# Altium PCB hapticDriverV3.PcbDoc
Units mm, origin at the board's own origin, x right, y up, seen from the top; angles counter-clockwise.
Board outline 27.94 x 55 mm, 4 copper layers (Top Layer, Int1 (GND), Int2 (PWR), Bottom Layer), stack 1.369 mm thick; 78 components, 72 nets, 325 pads, 120 vias.
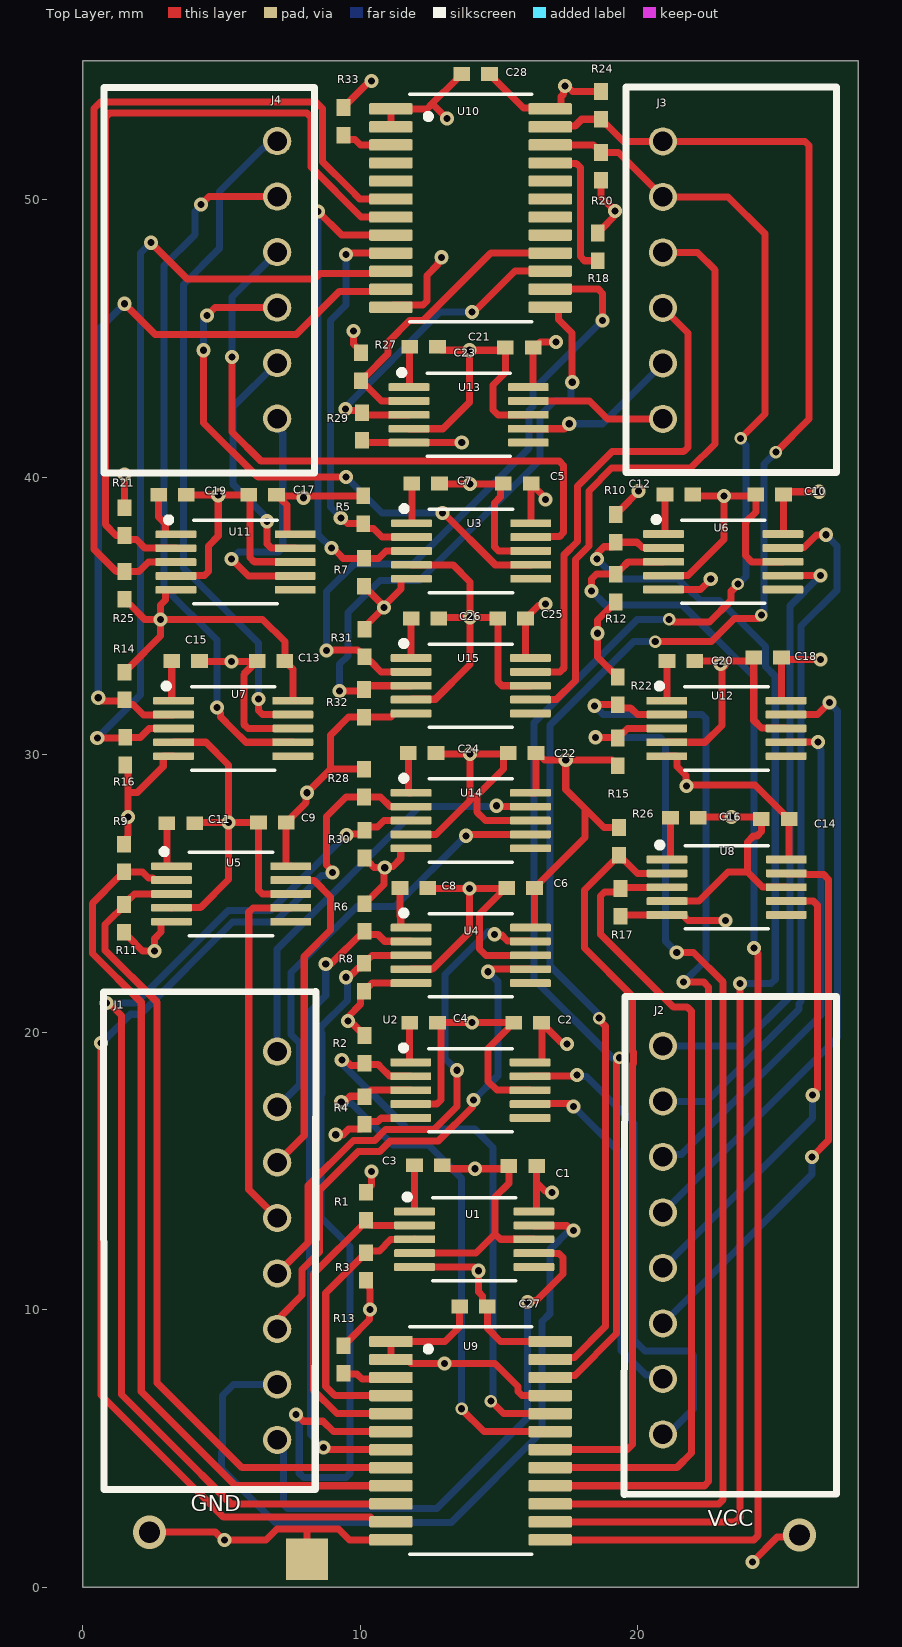
[diagram p0: Top Layer view]
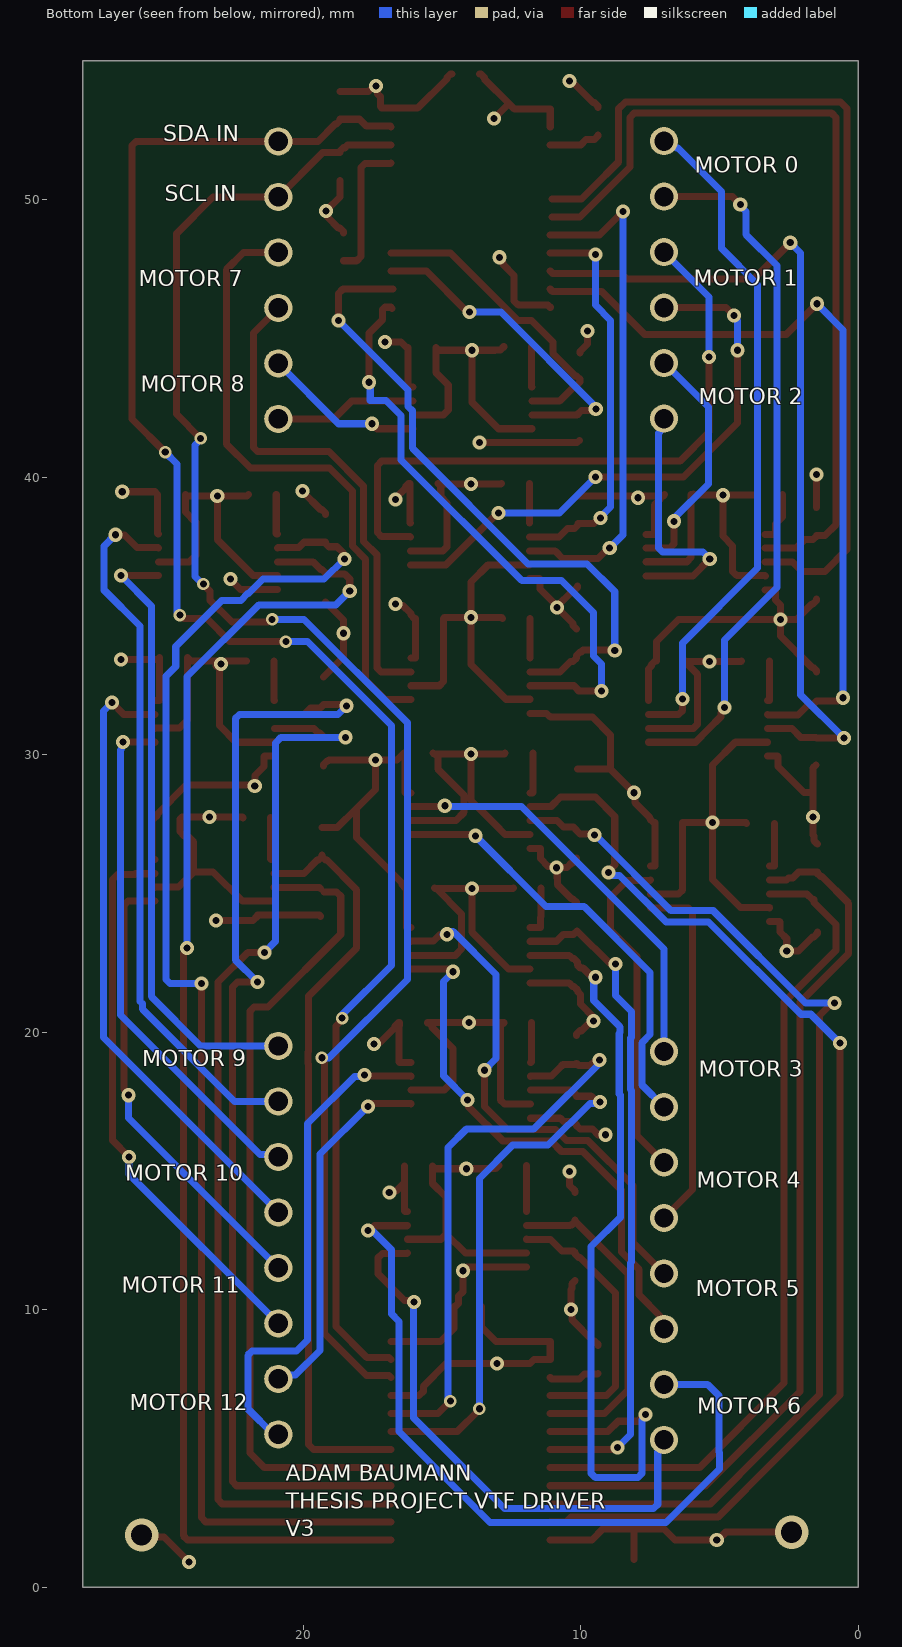
[diagram p1: Bottom Layer view, seen from below]
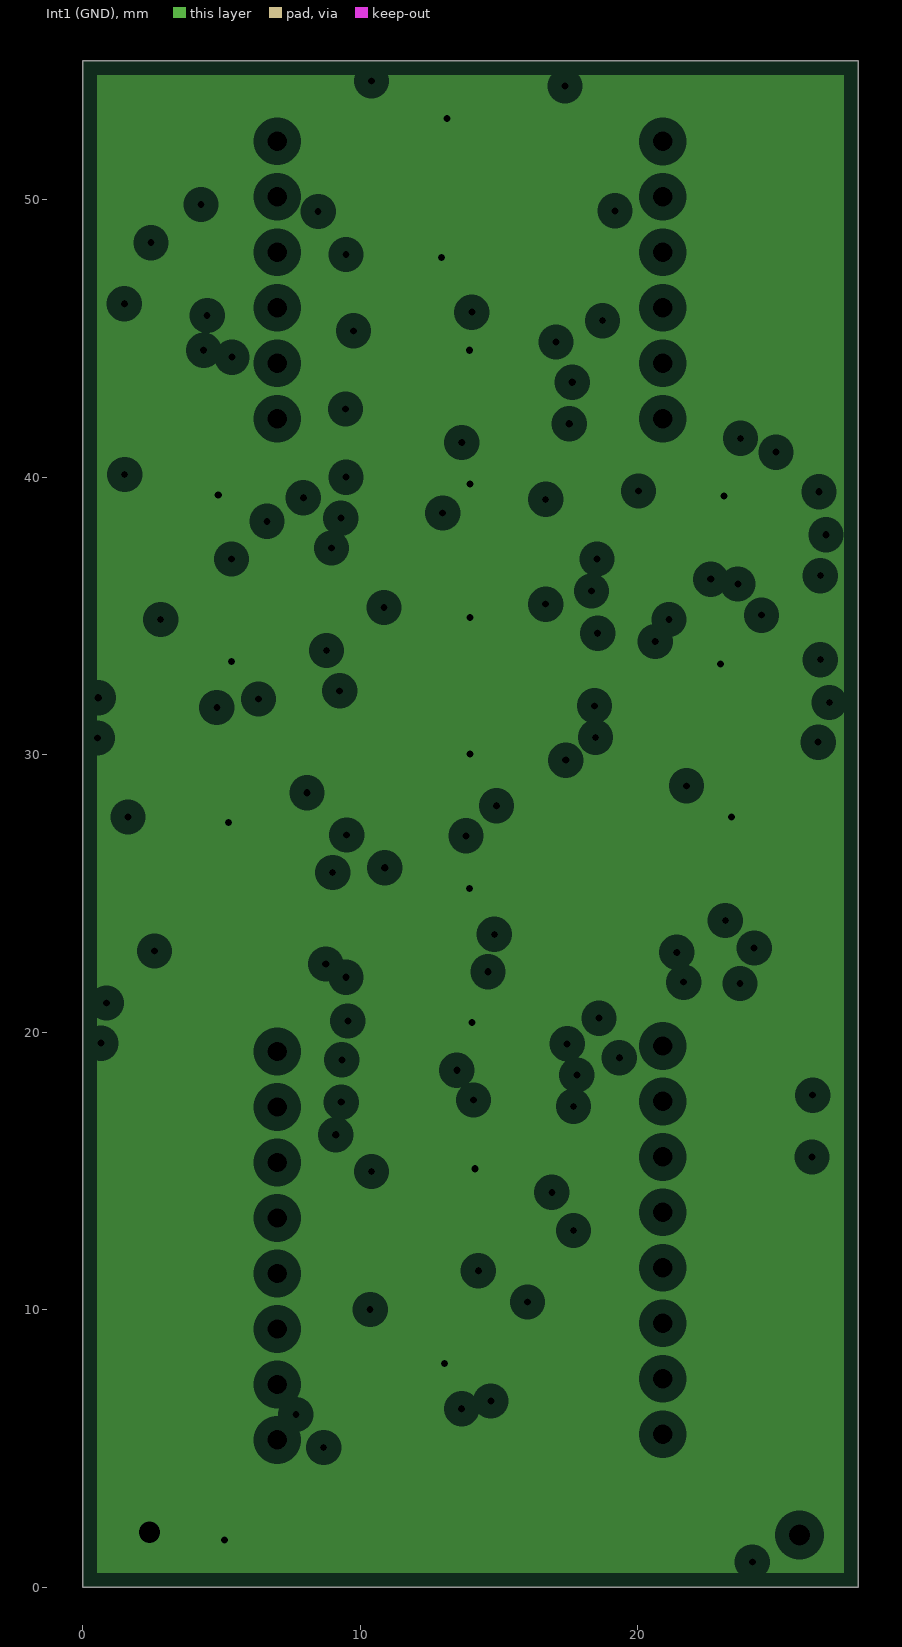
[diagram p2: Int1 (GND), clearances drawn from the general rule]
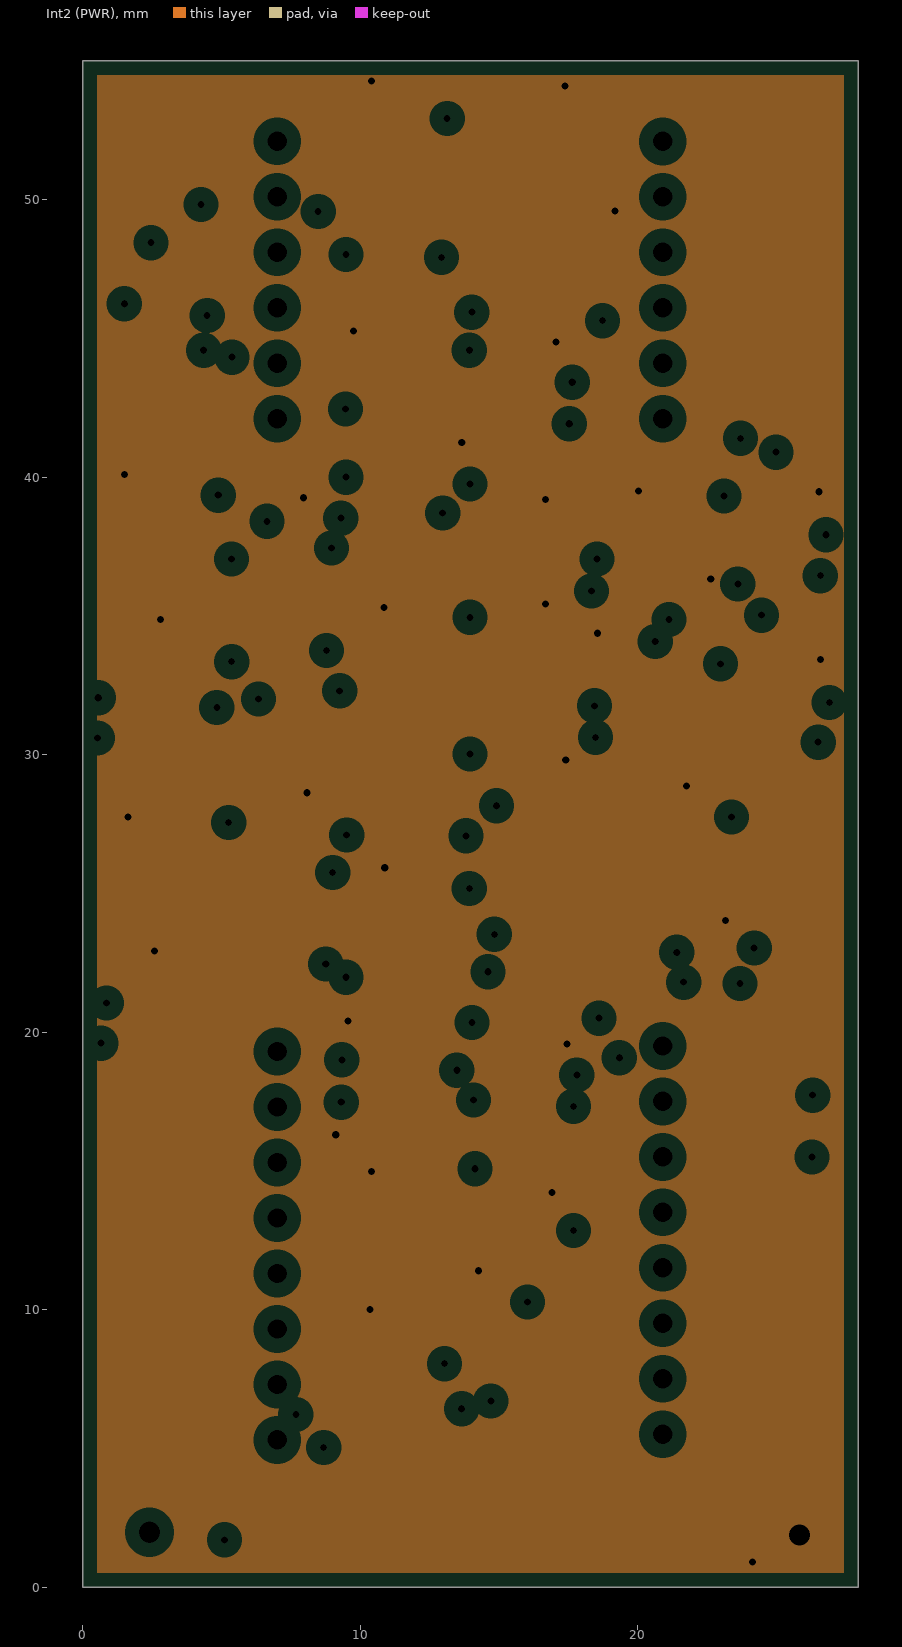
[diagram p3: Int2 (PWR), clearances drawn from the general rule]

## Layer stack, top to bottom
Top Solder: solder mask 0.0254, SM-001, Dk 4
Top Layer: signal copper 0.035
Dielectric 1: prepreg 0.1295, PP-017, Dk 4.3
Dielectric 2: prepreg 0.1295, PP-017, Dk 4.3
Int1 (GND): plane copper 0.035, net GND
Dielectric 3: core 0.7112, Core-039, Dk 4.8
Int2 (PWR): plane copper 0.035, net VCC
Dielectric 4: prepreg 0.1295, PP-017, Dk 4.3
Dielectric 5: prepreg 0.1295, PP-017, Dk 4.3
Bottom Layer: signal copper 0.035
Bottom Solder: solder mask 0.0254, SM-001, Dk 4

## Board outline
0,0 0,55 27.94,55 27.94,0

## Design rules (kind name [scope] priority, off if disabled: settings)
Clearance [All] p1: gap=0.152 ignorepadtopadclearanceinfootprint=FALSE except(0: Arc-Hole Track-Hole SMDPad-Hole THPad-Hole Via-Hole Fill-Text Fill-Hole Poly-Text Poly-Hole Region-Text Region-Hole Text-Text Text-Hole)
HoleSize [All] p1: absolutevalues=TRUE maxlimit=2 minlimit=0.2 maxpercent=80.000 minpercent=20.000
PlaneClearance [All] p1: clearance=0.508
PlaneConnect [All] p1: planeconnectstyle=Relief reliefexpansion=0.508 reliefentries=4 reliefconductorwidth=0.254 reliefairgap=0.254
PolygonConnect [All] p1: connectstyle=Relief reliefconductorwidth=0.254 reliefentries=4 polygonreliefangle="90 Angle" airgapwidth=0.254
RoutingVias [All] p1: holewidth=0.254 width=0.508 viastyle="Through Hole" minholewidth=0.2 minwidth=0.45 maxholewidth=0.711 maxwidth=1.27
SilkToSilkClearance [All] p1: silktosilkclearance=0
SolderMaskExpansion [All] p1: expansion=0.102 istentingtop=FALSE
Width [All] p1: maxlimit=0.254 minlimit=0.254 preferedwidth=0.254
26 further rules are at their usual default settings.

## Components (designator, comment, footprint, x,y, rotation, side; value= is the part's Value field where it differs from the comment)
C1 "Cap Pol3" 0402 15.85,15.175 r180 top value=1uF
C2 "Cap Pol3" 0402 16.025,20.337 r180 top value=1uF
C3 "Cap Pol3" 0402 12.45,15.2 r0 top value=1uF
C4 "Cap Pol3" 0402 12.275,20.337 r0 top value=1uF
C5 "Cap Pol3" 0402 15.65,39.771 r180 top value=1uF
C6 "Cap Pol3" 0402 15.775,25.195 r180 top value=1uF
C7 "Cap Pol3" 0402 12.35,39.771 r0 top value=1uF
C8 "Cap Pol3" 0402 11.925,25.195 r0 top value=1uF
C9 "Cap Pol3" 0402 6.825,27.55 r180 top value=1uF
C10 "Cap Pol3" 0402 24.75,39.38 r180 top value=1uF
C11 "Cap Pol3" 0402 3.525,27.525 r0 top value=1uF
C12 "Cap Pol3" 0402 21.475,39.38 r0 top value=1uF
C13 "Cap Pol3" 0402 6.775,33.375 r180 top value=1uF
C14 "Cap Pol3" 0402 24.95,27.675 r180 top value=1uF
C15 "Cap Pol3" 0402 3.7,33.375 r0 top value=1uF
C16 "Cap Pol3" 0402 21.675,27.725 r0 top value=1uF
C17 "Cap Pol3" 0402 6.475,39.369 r180 top value=1uF
C18 "Cap Pol3" 0402 24.675,33.5 r180 top value=1uF
C19 "Cap Pol3" 0402 3.225,39.369 r0 top value=1uF
C20 "Cap Pol3" 0402 21.55,33.375 r0 top value=1uF
C21 "Cap Pol3" 0402 15.725,44.675 r180 top value=1uF
C22 "Cap Pol3" 0402 15.825,30.054 r180 top value=1uF
C23 "Cap Pol3" 0402 12.275,44.7 r0 top value=1uF
C24 "Cap Pol3" 0402 12.225,30.054 r0 top value=1uF
C25 "Cap Pol3" 0402 15.45,34.912 r180 top value=1uF
C26 "Cap Pol3" 0402 12.325,34.912 r0 top value=1uF
C27 "Cap Pol3" 0402 14.075,10.104 r180 top value=1uF
C28 "Cap Pol3" 0402 14.15,54.529 r180 top value=1uF
J1 "8-pin-connector" 8-pin-connector 7,5.3 r180 top locked
J2 "8-pin-connector" 8-pin-connector 20.9,19.5 r0 top locked
J3 "6-pin-connector" 6-PIN-CONNECTOR 20.9,52.112 r0 top locked
J4 "6-pin-connector" 6-PIN-CONNECTOR 7,42.1 r180 top locked
R1 "Res1" 0402 10.2,13.725 r90 top value=2.2K
R2 "Res1" 0402 10.15,19.375 r90 top value=2.2K
R3 "Res1" 0402 10.2,11.55 r270 top value=2.2k
R4 "Res1" 0402 10.15,17.175 r270 top value=2.2k
R5 "Res1" 0402 10.1,38.825 r90 top value=2.2K
R6 "Res1" 0402 10.15,24.129 r90 top value=2.2K
R7 "Res1" 0402 10.125,36.575 r270 top value=2.2k
R8 "Res1" 0402 10.125,21.975 r270 top value=2.2k
R9 "Res1" 0402 1.475,26.275 r90 top value=2.2K
R10 "Res1" 0402 19.2,38.154 r90 top value=2.2K
R11 "Res1" 0402 1.475,24.1 r270 top value=2.2k
R12 "Res1" 0402 19.2,36 r270 top value=2.2k
R13 "Res3" 0402 9.386,8.2 r90 top value=10k
R14 "Res1" 0402 1.5,32.475 r90 top value=2.2K
R15 "Res1" 0402 19.325,26.875 r90 top value=2.2K
R16 "Res1" 0402 1.525,30.125 r270 top value=2.2k
R17 "Res1" 0402 19.375,24.675 r270 top value=2.2k
R18 "Res1" 0402 18.554,48.3 r270 top value=2.2K
R20 "Res1" 0402 18.675,51.2 r90 top value=2.2K
R21 "Res1" 0402 1.5,38.4 r90 top value=2.2K
R22 "Res1" 0402 19.275,32.3 r90 top value=2.2K
R24 "Res1" 0402 18.675,53.4 r270 top value=2.2K
R25 "Res1" 0402 1.5,36.1 r270 top value=2.2k
R26 "Res1" 0402 19.275,30.1 r270 top value=2.2k
R27 "Res1" 0402 10.025,43.979 r90 top value=2.2K
R28 "Res1" 0402 10.125,28.975 r90 top value=2.2K
R29 "Res1" 0402 10.05,41.825 r270 top value=2.2k
R30 "Res1" 0402 10.15,26.775 r270 top value=2.2k
R31 "Res1" 0402 10.15,34.025 r90 top value=2.2K
R32 "Res1" 0402 10.125,31.85 r270 top value=2.2k
R33 "Res3" 0402 9.386,52.825 r90 top value=10k
U1 "DRV2605LDGSR" SOP50P490X110-10N 14.1,12.534 r0 top
U2 "DRV2605LDGSR" SOP50P490X110-10N 13.964,17.907 r0 top
U3 "DRV2605LDGSR" SOP50P490X110-10N 13.989,37.341 r0 top locked
U4 "DRV2605LDGSR" SOP50P490X110-10N 13.975,22.766 r0 top
U5 "DRV2605LDGSR" SOP50P490X110-10N 5.339,24.979 r0 top
U6 "DRV2605LDGSR" SOP50P490X110-10N 23.075,36.95 r0 top
U7 "DRV2605LDGSR" SOP50P490X110-10N 5.414,30.946 r0 top
U8 "DRV2605LDGSR" SOP50P490X110-10N 23.2,25.221 r0 top
U9 "TCA9548APWR" SOP65P640X120-24N 13.97,5.275 r0 top locked
U10 "TCA9548APWR" SOP65P640X120-24N 13.97,49.7 r0 top locked
U11 "DRV2605LDGSR" SOP50P490X110-10N 5.5,36.94 r0 top locked
U12 "DRV2605LDGSR" SOP50P490X110-10N 23.189,30.946 r0 top
U13 "DRV2605LDGSR" SOP50P490X110-10N 13.9,42.246 r0 top
U14 "DRV2605LDGSR" SOP50P490X110-10N 13.975,27.624 r0 top
U15 "DRV2605LDGSR" SOP50P490X110-10N 13.975,32.483 r0 top

## Footprints (in the part's own frame and the unit in brackets; to place one, negate y for a bottom-side part, rotate by r counter-clockwise, add the part's x,y. Pads: shape width x height; smd on the part's side, far side on the other; paste and mask are expansions set on the pad)
6-PIN-CONNECTOR [mil] "J"
  round 40 hole 27.56: 0(0,-0.49) 1(0,-79.23) 2(0,-157.97) 3(0,-236.71) 4(0,-315.45) 5(0,-394.19)
  silkscreen extent -53,-471 246,77
8-pin-connector [mil]
  round 40 hole 27.56: 0(0,0) 1(0,-78.74) 2(0,-157.48) 3(0,-236.22) 4(0,-314.96) 5(0,-393.7) 6(0,-472.44) 7(0,-551.18)
  silkscreen extent -55,-636 247,70
0402 [mm] "Chip Capacitor, Body 1.0x0.5mm, IPC High Density"
  rect 0.6x0.5 smd: 1(-0.5,0) 2(0.5,0)
  body extent -0.55,-0.3 0.55,0.3, height 1.3
SOP50P490X110-10N [mm]
  rrect25% 1.47x0.28 smd: 1(-2.15,1) 2(-2.15,0.5) 3(-2.15,0) 4(-2.15,-0.5) 5(-2.15,-1) 6(2.15,-1) 7(2.15,-0.5) 8(2.15,0) 9(2.15,0.5) 10(2.15,1)
  silkscreen extent -2.51,-1.5 1.5,1.62
SOP65P640X120-24N [mm]
  rrect25% 1.57x0.41 smd: 1(-2.87,3.575) 2(-2.87,2.925) 3(-2.87,2.275) 4(-2.87,1.625) 5(-2.87,0.975) 6(-2.87,0.325) 7(-2.87,-0.325) 8(-2.87,-0.975) 9(-2.87,-1.625) 10(-2.87,-2.275) 11(-2.87,-2.925) 12(-2.87,-3.575) 13(2.87,-3.575) 14(2.87,-2.925) 15(2.87,-2.275) 16(2.87,-1.625) 17(2.87,-0.975) 18(2.87,-0.325) 19(2.87,0.325) 20(2.87,0.975) 21(2.87,1.625) 22(2.87,2.275) 23(2.87,2.925) 24(2.87,3.575)
  silkscreen extent -2.2,-4.1 2.2,4.1

## Part data
C1 C2 C3 C4 C5 C6 C7 C8 C9 C10 C11 C12 C13 C14 C15 C16 C17 C18 C19 C20 C21 C22 C23 C24 C25 C26 C27 C28: "Polarized Capacitor (Surface Mount)", LatestRevisionDate=29-May-2009, LatestRevisionNote="IPC-7351 Footprint Added.", PackageDescription="Chip Capacitor", PackageReference=C0805, Published=8-Jun-2000, Publisher="Altium Limited"
R1 R2 R3 R4 R5 R6 R7 R8 R9 R10 R11 R12 R13 R14 R15 R16 R17 R18 R20 R21 R22 R24 R25 R26 R27 R28 R29 R30 R31 R32 R33: "Resistor", Published=8-Jun-2000, Publisher="Altium Limited"
  R1 R2 R3 R4 R5 R6 R7 R8 R9 R10 R11 R12 R14 R15 R16 R17 R18 R20 R21 R22 R24 R25 R26 R27 R28 R29 R30 R31 R32: LatestRevisionDate=17-Jul-2002, LatestRevisionNote="Re-released for DXP Platform.", PackageDescription="Axial Device, Thru-Hole; 2 Leads; 0.3 in Pin Spacing", PackageReference=AXIAL-0.3
  R13 R33: LatestRevisionDate=29-May-2009, LatestRevisionNote="IPC-7351 Footprint Added.", PackageDescription="Chip Resistor", PackageReference=J1-0603
U1 U2 U3 U4 U5 U6 U7 U8 U11 U12 U13 U14 U15: "Haptic Driver for ERM and LRA with Built-In Library and Smart Loop Architecture 10-VSSOP -40 to 85", Package=None, Availability=Unavailable, MP=DRV2605LDGSR, Price=None
U9 U10: "Low-Voltage 8-Channel I2C Switch With Reset", Package="TSSOP-24 Texas Instruments", Arrow_Electronics-Purchase-URL=https://snapeda.com/shop?store=Arrow+Electronics&id=280817, Availability=Unavailable, DigiKey-Purchase-URL=https://snapeda.com/shop?store=DigiKey&id=280817, MF="Texas Instruments", Mouser-Purchase-URL=https://snapeda.com/shop?store=Mouser&id=280817, MP=TCA9548APWR, Price=None, SnapEDA_Link=https://www.snapeda.com/parts/TCA9548APWR/Texas%20Instruments/view-part/280817/?ref=snap, Texas_Instruments-Purchase-URL=https://snapeda.com/shop?store=Texas+Instruments&id=280817

## Free pads (board coordinates)
  rect 1.5x1.5 smd: 2(8.075,1)

## Via types
v1: diameter 0.508, hole 0.254, Top Layer to Bottom Layer, 76 vias
v2: diameter 0.508, hole 0.256, Top Layer to Bottom Layer, 32 vias
v3: diameter 0.45, hole 0.254, Top Layer to Bottom Layer, 10 vias
v4: diameter 1.2, hole 0.762, Top Layer to Bottom Layer, 2 vias

## Nets (pads, with @x,y where several pads share a name; then routed paths per layer and width w, separated by ;. In a path a pad name is that pad's centre, name@x,y a point inside that pad or via, vN(x,y) a via of type N, cw(c..) or ccw(c..) an arc to the next point about the centre after c; other vN are vias at no path point)
\: J2.1 U6.9 | length 25.9
  Top Layer w0.254: U6.9 25.238,37.463 25.988,37.463 26.438,37.913 26.763,37.913 v1(26.775,37.925)
  Bottom Layer w0.254: J2.1 22.475,17.5 25.8,20.825 25.8,21.025 25.881,21.107 25.881,34.631 27.175,35.925 27.175,37.525 v1(26.775,37.925)
GND: C1.2 C2.2 C3.2 C4.2 C5.2 C6.2 C7.2 C8.2 C9.2 C10.2 C11.2 C12.2 C13.2 C14.2 C15.2 C16.2 C17.2 C18.2 C19.2 C20.2 C21.2 C22.2 C23.2 C24.2 C25.2 C26.2 C27.2 C28.2 pad.2 U1.4 U1.8 U2.4 U2.8 U3.4 U3.8 U4.4 U4.8 U5.4 U5.8 U6.4 U6.8 U7.4 U7.8 U8.4 U8.8 U9.1 U9.2 U9.12 U9.21 U10.1 U10.2 U10.12 U11.4 U11.8 U12.4 U12.8 U13.4 U13.8 U14.4 U14.8 U15.4 U15.8 | length 164.5
  Top Layer w0.254: v4(2.4,1.975) 4.775,1.975 5.075,1.675 v2(5.1,1.7) 6.6,1.7 6.994,2.094 8.1,2.094 ; U5.4 3.202,24.492 4.242,24.492 5.25,25.5 v1(5.25,27.55) ; U7.4 4.429,30.446 5.25,29.625 v1(5.25,27.55) ; U11.4 3.363,36.453 4.376,36.453 4.525,36.601 4.525,37.525 4.875,37.875 v1(4.875,39.35) ; C19.2 3.744,39.35 v1(4.875,39.35) ; C11.2 4.05,27.55 v1(5.25,27.55) ; C15.2 4.225,33.35 5.25,33.35 6.2,33.35 C13.2@6.225,33.375 ; C17.2@5.944,39.4 C17.2 5.956,39.35 v1(4.875,39.35) ; C17.2@6.025,39.383 6.025,37.101 6.174,36.953 7.637,36.953 U11.8 ; C13.2@6.102,33.252 6.102,33.202 5.796,32.896 5.796,31.095 5.944,30.946 U7.8 ; U5.8 7.485,24.975 6.475,24.975 6.325,25.125 C9.2 v1(5.25,27.55) ; pad.2 8.075,2.069 8.1,2.094 ; U9.12 9.6,1.7 9.206,2.094 8.1,2.094 ; U10.12 11.178,46.203 12.251,46.203 12.4,46.352 12.4,47.275 12.798,47.673 12.798,47.729 12.925,47.856 v1(12.925,47.925) ; U10.2 U10.1 12.396,53.275 12.585,53.465 ; U13.4 12.971,41.746 13.925,42.7 v1(13.925,44.575) ; U2.4 12.751,17.407 12.9,17.556 12.9,20.214 C4.2 C4.2 12.788,20.35 v1(14.025,20.35) 15.512,20.35 C2.2 15.475,20.337 15.352,20.214 15.352,20.164 14.6,19.412 14.6,18.225 14.918,17.907 U2.8 ; U4.4 11.838,22.279 12.604,22.279 13.925,23.6 v1(13.925,25.175) ; U14.4 12.724,27.124 13.1,27.5 13.95,28.35 v1(13.95,30.025) ; U15.4 11.838,31.996 12.696,31.996 13.95,33.25 v1(13.95,34.95) ; U3.4 13.334,36.841 13.95,36.225 v1(13.95,34.95) ; U1.4 14.159,12.034 14.85,12.725 ; C8.2 12.445,25.175 v1(13.925,25.175) ; C24.2 12.754,30.025 v1(13.95,30.025) ; C23.2 12.898,44.577 13.095,44.577 13.097,44.575 v1(13.925,44.575) ; C26.2 12.863,34.95 v1(13.95,34.95) ; C7.2 12.871,39.75 v1(13.95,39.75) C5.2@15.129,39.75 ; C3.2 13.073,15.077 13.27,15.077 13.272,15.075 v1(14.125,15.075) 15.25,15.075 C1.2 15.35,14.55 14.85,14.05 14.85,12.725 ; v1(13.125,52.925) 12.585,53.465 ; C27.2 13.575,9.375 13.05,8.85 U9.1 U9.2 11.68,8.2 11.83,8.05 v1(13.025,8.05) 14.85,8.05 15.675,7.225 15.675,7.049 15.824,6.9 U9.21 ; C28.2 13.6,54.529 13.477,54.406 13.477,54.356 12.585,53.465 ; C5.2 C5.2@15.129,39.75 ; C6.2 15.255,25.175 C6.2@15.205,25.175 ; C22.2 15.296,30.025 C22.2@15.246,30.025 ; U13.8 14.954,42.246 14.775,42.425 14.775,43.325 15.225,43.775 C21.2 15.125,44.575 v1(13.925,44.575) ; U4.8 14.524,22.766 14.292,22.998 14.292,24.262 C6.2@15.205,25.175 ; U14.8 14.501,27.624 14.2,27.925 14.2,28.525 15.152,29.477 15.152,29.931 C22.2@15.246,30.025 ; U15.8 15.099,32.483 14.95,32.632 C25.2 14.912,34.95 v1(13.95,34.95) ; U3.8 14.974,37.341 14.825,37.49 14.825,39.075 15.045,39.295 15.045,39.666 C5.2@15.129,39.75 ; U1.8 15.041,12.534 14.85,12.725 ; U6.4 20.93,36.455 21.805,36.455 23.1,37.75 v1(23.1,39.325) ; U12.4 22.421,30.446 23.025,31.05 23.025,33.086 23.137,33.199 23.137,33.337 v1@23.175,33.375 ; U8.4 22.196,24.721 23.25,25.775 23.95,25.775 ; C12.2 22.03,39.325 v1(23.1,39.325) ; C20.2 22.802,33.375 22.904,33.273 v1(22.973,33.273) ; C16.2 22.2,27.75 v1(23.375,27.75) 24.375,27.75 C14.2 24.45,27.224 24.301,27.075 24.175,27.075 23.95,26.85 23.95,25.775 ; v1@22.973,33.375 v1@23.175,33.375 ; U6.8 24.1,36.95 23.875,37.175 23.875,38.375 24.25,38.75 C10.2 24.195,39.325 v1(23.1,39.325) ; U12.8 25.326,30.959 24.455,30.959 24.175,31.239 24.175,33.377 C18.2 24.052,33.377 23.855,33.377 23.853,33.375 v1@23.175,33.375 ; U8.8 25.337,25.234 24.491,25.234 23.95,25.775 ; v1(13.925,25.175) C6.2@15.205,25.175 ; v1(13.95,30.025) C22.2@15.246,30.025
  other v1: 5.358,33.35
NetC3_1: C3.1 U1.1 | length 1.7
  Top Layer w0.254: U1.1 C3.1
NetC4_1: C4.1 U2.1 | length 1.5
  Top Layer w0.254: C4.1 11.775,18.92 11.788,18.907 U2.1
NetC7_1: C7.1 U3.1 | length 1.4
  Top Layer w0.254: U3.1 11.85,38.352 C7.1
NetC8_1: C8.1 U4.1 | length 1.8
  Top Layer w0.254: C8.1 11.425,24.166 11.453,24.138 11.453,23.779 11.466,23.766 U4.1
NetC11_1: C11.1 U5.1 | length 1.7
  Top Layer w0.254: C11.1 3.025,25.992 3.038,25.979 U5.1
NetC12_1: C12.1 U6.1 | length 1.5
  Top Layer w0.254: U6.1 20.962,37.95 20.975,37.963 C12.1
NetC15_1: C15.1 U7.1 | length 1.5
  Top Layer w0.254: C15.1 3.2,31.959 3.213,31.946 U7.1
NetC16_1: C16.1 U8.1 | length 1.6
  Top Layer w0.254: U8.1 21.162,26.221 21.175,26.234 C16.1
NetC19_1: C19.1 U11.1 | length 1.9
  Top Layer w0.254: C19.1 2.725,38.565 2.978,38.312 2.978,37.953 2.991,37.94 U11.1
NetC20_1: C20.1 U12.1 | length 1.4
  Top Layer w0.254: U12.1 21.05,31.957 C20.1
NetC23_1: C23.1 U13.1 | length 1.5
  Top Layer w0.254: U13.1 11.762,43.246 11.775,43.259 C23.1
NetC24_1: C24.1 U14.1 | length 1.5
  Top Layer w0.254: C24.1 11.725,28.637 11.738,28.624 U14.1
NetC26_1: C26.1 U15.1 | length 1.4
  Top Layer w0.254: U15.1 C26.1
NetR13_1: R13.1 U9.3 | length 1.8
  Top Layer w0.254: R13.1 9.404,7.682 9.868,7.682 10.05,7.5 11.05,7.5 U9.3
NetR18_2: R18.2 U10.21 | length 5.1
  Top Layer w0.254: U10.21 16.855,51.31 17.776,51.31 17.925,51.161 17.925,47.95 18.075,47.8 R18.2
NetR33_1: R33.1 U10.3 | length 1.9
  Top Layer w0.254: R33.1 9.386,52.29 9.509,52.167 9.808,52.167 10,51.975 U10.3
"OUT 0+": J1.0 U1.7 | length 20.2
  Top Layer w0.254: v1(16.017,10.275) 16.065,10.324 16.349,10.324 17.3,11.275 17.3,11.872 17.151,12.021 16.263,12.021 U1.7
  Bottom Layer w0.254: J1.0 7,5.094 7.225,4.869 7.225,2.974 7.374,2.825 12.75,2.825 16.025,6.1 16.025,10.267 v1(16.017,10.275)
"OUT 0-": J1.1 U1.9 | length 27.8
  Top Layer w0.254: U1.9 16.263,13.021 17.436,13.021 17.606,12.85 v1(17.675,12.85)
  Bottom Layer w0.254: J1.1 5.425,7.3 5.025,6.9 5.025,4.875 5,4.85 5,4.25 6.925,2.325 13.275,2.325 16.55,5.6 16.55,9.575 16.824,9.849 16.824,12.158 17.517,12.85 v1(17.675,12.85)
"OUT 1+": J1.2 U4.7 | length 19.3
  Top Layer w0.254: J1.2 7.146,9.446 7.146,9.771 7.894,10.519 7.894,11.443 8.525,12.075 8.525,14.3 9.914,15.689 10.684,15.689 11.077,16.082 12.813,16.082 14.037,17.306 14.037,17.512 v1(14.075,17.55) ; v1(14.6,22.175) 14.653,22.175 14.744,22.266 U4.7
  Bottom Layer w0.254: v1(14.075,17.55) 14.95,18.425 14.95,21.825 v1(14.6,22.175)
"OUT 1-": J1.3 U4.9 | length 19.2
  Top Layer w0.254: J1.3 8.119,12.419 8.119,14.468 9.746,16.096 10.516,16.096 10.908,16.488 12.644,16.488 13.475,17.319 v1(13.475,18.625) ; v1(14.825,23.525) 15.055,23.525 15.301,23.279 16.112,23.279 U4.9
  Bottom Layer w0.254: v1(13.475,18.625) 13.05,19.05 13.05,22.075 14.597,23.622 14.859,23.622 14.956,23.525 v1(14.825,23.525)
"OUT 2+": J1.4 U5.7 | length 13
  Top Layer w0.254: J1.4 5.975,14.325 5.975,24.326 6.124,24.475 7.485,24.475 U5.7
"OUT 2-": J1.5 U5.9 | length 12.1
  Top Layer w0.254: J1.5 7.975,16.275 7.975,22.725 8.925,23.675 8.925,24.875 8.334,25.466 7.502,25.466 U5.9
"OUT 3+": J1.6 U14.7 | length 16
  Top Layer w0.254: v1(13.8,27.075) 13.849,27.124 U14.7
  Bottom Layer w0.254: J1.6 7.8,18.1 7.8,19.614 7.5,19.914 7.5,22.15 9.875,24.525 11.25,24.525 v1(13.8,27.075)
"OUT 3-": J1.7 U14.9 | length 15
  Top Layer w0.254: v1(14.9,28.158) 14.933,28.124 U14.9
  Bottom Layer w0.254: J1.7 7,23 12.129,28.129 14.871,28.129 v1(14.9,28.158)
"OUT 4+": J2.0 U6.7 | length 22.3
  Top Layer w0.254: U6.7@25.225,36.45 v1(26.575,36.45)
  Bottom Layer w0.254: J2.0 23.7,19.5 25.475,21.275 25.475,35.35 v1(26.575,36.45)
"OUT 5+": J2.2 U12.7 | length 18.8
  Top Layer w0.254: U12.7 25.344,30.45 v1(26.496,30.45)
  Bottom Layer w0.254: J2.2 20.987,15.587 21.562,15.587 26.594,20.619 26.594,30.174 26.544,30.224 26.544,30.401 v1(26.496,30.45)
"OUT 5-": J2.3 U12.9 | length 22.8
  Top Layer w0.254: U12.9 26.471,31.446 v1(26.9,31.875)
  Bottom Layer w0.254: J2.3 27.2,19.8 27.2,31.575 v1(26.9,31.875)
"OUT 6+": J2.4 U8.7 | length 16.6
  Top Layer w0.254: U8.7 26.32,24.721 26.469,24.572 26.469,17.947 26.3,17.778 v1(26.3,17.725)
  Bottom Layer w0.254: J2.4 26.3,16.9 v1(26.3,17.725)
"OUT 6-": J2.5 U8.9 | length 20.1
  Top Layer w0.254: U8.9 25.363,25.708 26.038,25.708 26.071,25.675 26.7,25.675 26.875,25.5 26.875,16.1 v1(26.275,15.5)
  Bottom Layer w0.254: J2.5 26.275,14.875 v1(26.275,15.5)
"OUT 7+": J2.6 U2.7 | length 12.9
  Top Layer w0.254: U2.7 16.127,17.42 v1@17.577,17.42
  Bottom Layer w0.254: v1(17.675,17.325) 19.4,15.6 19.4,8.525 20.288,7.637 20.763,7.637 J2.6
"OUT 7-": J2.7 U2.9 | length 18.1
  Top Layer w0.254: U2.9 16.127,18.42 17.77,18.42 v1(17.8,18.45)
  Bottom Layer w0.254: v1(17.8,18.45) 17.845,18.405 18.145,18.405 19.85,16.7 19.85,8.9 20.25,8.5 21.851,8.5 22,8.351 22,6.425 21.075,5.5 J2.7
"OUT 8+": J3.2 U15.7 | length 22.6
  Top Layer w0.254: U15.7 17.058,31.983 17.75,32.675 17.75,37.037 18.231,37.518 18.231,39.506 19.05,40.325 21.9,40.325 22.775,41.2 22.775,47.475 22.15,48.1 J3.2
"OUT 8-": J3.3 U15.9 | length 18
  Top Layer w0.254: U15.9 17.195,32.983 17.344,33.132 17.344,37.205 17.824,37.686 17.824,39.674 19.075,40.925 21.651,40.925 21.8,41.074 21.8,45.2 J3.3
"OUT 9+": J3.4 U13.7 | length 6
  Top Layer w0.254: U13.7 17.346,41.746 v1(17.525,41.925) ; J3.4@20.694,44.1 J3.4
  Bottom Layer w0.254: v1(17.525,41.925) 18.725,41.925 J3.4
"OUT 9-": J3.5 U13.9 | length 5.1
  Top Layer w0.254: U13.9 18.254,42.746 18.9,42.1 J3.5
"OUT 10+": J4.0 U11.7 | length 9.3
  Top Layer w0.254: v1(5.35,37.05) 5.96,36.44 U11.7
  Bottom Layer w0.254: v1(5.35,37.05) 5.6,37.3 7.051,37.3 7.2,37.449 7.2,41.583 7.146,41.637 7.146,41.967 J4.0
"OUT 10-": J4.1 U11.9 | length 8.8
  Top Layer w0.254: v1(6.636,38.411) 6.636,37.601 6.784,37.453 7.637,37.453 U11.9
  Bottom Layer w0.254: v1(6.636,38.411) 6.636,38.519 5.4,39.754 5.4,42.525 6.987,44.112 J4.1
"OUT 11+": J4.2 U3.7 | length 20.5
  Top Layer w0.254: v1(4.35,44.575) 4.35,41.95 6.3,40 v1(9.475,40) ; v1(4.475,45.825) 4.762,46.112 J4.2 ; v1(12.963,38.704) 12.963,38.713 12.975,38.725 14.859,36.841 U3.7
  Bottom Layer w0.254: v1(4.35,44.575) 4.35,45.647 4.475,45.772 v1(4.475,45.825) ; v1(9.475,40) 10.771,38.704 v1(12.963,38.704)
"OUT 11-": J4.3 U3.9 | length 23.3
  Top Layer w0.254: v1(5.375,44.325) 5.375,41.625 6.425,40.575 17.176,40.575 17.325,40.426 17.325,38.003 17.176,37.854 16.152,37.854 U3.9
  Bottom Layer w0.254: v1(5.375,44.325) 5.375,46.487 J4.3
"OUT 12+": J4.4 U7.7 | length 25.7
  Top Layer w0.254: v1(4.25,49.825) 4.537,50.112 J4.4 ; v1(4.825,31.7) 4.825,31.631 4.952,31.504 4.952,31.363 5.389,30.926 5.87,30.446 U7.7
  Bottom Layer w0.254: v1(4.25,49.825) 4.25,49.789 4.039,49.578 4.039,48.739 2.925,47.625 2.925,36.025 4.825,34.125 v1(4.825,31.7)
"OUT 12-": J4.5 U7.9 | length 24.5
  Top Layer w0.254: v1(6.329,32.007) 6.325,32.003 6.325,31.595 6.474,31.446 U7.9
  Bottom Layer w0.254: v1(6.329,32.007) 6.325,32.011 6.325,34.025 3.625,36.725 3.625,46.95 4.925,48.25 4.925,50.3 6.494,51.869 6.55,51.869 6.794,52.112 J4.5
SCL0: R1.1 U1.2 U9.5 | length 11.9
  Top Layer w0.254: R1.1 R1.1@10.2,13.175 ; U9.5 9.15,6.25 8.3,7.1 8.3,11.275 R1.1@10.2,13.175 ; U1.2 10.391,13.034 10.373,13.052 10.323,13.052 R1.1@10.2,13.175
SCL1: R6.1 U4.2 U9.7 | length 24.1
  Top Layer w0.254: v1(8.675,5.025) 8.75,4.95 U9.7 ; v1(8.75,22.45) 8.929,22.45 10.129,23.65 R6.1 10.255,23.524 10.626,23.524 10.875,23.275 11.816,23.275 U4.2
  Bottom Layer w0.254: v1(8.675,5.025) 8.204,5.496 8.204,11.677 8.169,11.713 8.169,17.894 8.206,17.932 8.206,19.782 8.176,19.813 8.176,20.748 8.75,21.322 v1(8.75,22.45)
SCL2: R9.1 U5.2 U9.9 | length 32.2
  Top Layer w0.254: U5.2 2.594,25.479 2.514,25.56 2.359,25.56 2.144,25.775 R9.1 1.475,25.725 1.352,25.602 1.302,25.602 0.343,24.643 0.343,22.833 2.1,21.075 2.1,7.05 5.5,3.65 U9.9
SCL3: R28.1 U9.11 U14.2 | length 41.5
  Top Layer w0.254: v1(0.65,19.6) 0.65,6.924 2.98,4.594 5.058,2.516 10.354,2.516 10.52,2.35 U9.11 ; v1(8.998,25.752) 8.998,25.799 8.775,26.022 8.775,27.775 9.475,28.475 R28.1 10.725,28.475 11.062,28.137 11.812,28.137 U14.2
  Bottom Layer w0.254: v1(0.65,19.6) 0.665,19.6 1.708,20.644 2.068,20.644 5.393,23.969 6.918,23.969 8.6,25.65 8.896,25.65 v1(8.998,25.752)
SCL4: R10.1 U6.2 U9.14 | length 49.9
  Top Layer w0.254: U9.14 23.526,2.35 23.675,2.499 v1(23.675,21.75) ; v1(18.521,37.054) 18.57,37.102 18.57,37.282 18.781,37.493 19.077,37.493 19.2,37.616 R10.1 19.972,37.654 20.162,37.463 20.912,37.463 U6.2
  Bottom Layer w0.254: v1(18.521,37.054) 19.25,36.325 21.45,36.325 21.969,35.806 22.004,35.806 22.251,35.559 22.941,35.559 24.596,33.904 24.596,33.179 24.95,32.825 24.95,21.899 24.801,21.75 v1(23.675,21.75)
SCL5: R22.1 U9.16 U12.2 | length 41.4
  Top Layer w0.254: U9.16 22.401,3.65 22.55,3.799 22.55,21.625 22.375,21.8 v1(21.65,21.8) ; v1(18.44,31.76) 18.479,31.8 R22.1 19.39,31.685 19.74,31.685 19.979,31.446 U12.2
  Bottom Layer w0.254: v1(18.44,31.76) 18.75,31.45 22.301,31.45 22.45,31.301 22.45,22.6 v1(21.65,21.8)
SCL6: R15.1 U8.2 U9.18 | length 27.5
  Top Layer w0.254: U9.18 19.626,4.95 19.809,5.133 19.809,18.841 19.834,18.866 19.834,19.284 19.809,19.309 19.809,21.291 18.075,23.025 18.075,25.125 19.152,26.202 19.202,26.202 R15.1@19.325,26.325 ; R15.1 R15.1@19.325,26.325 ; U8.2 19.979,25.721 19.498,26.202 19.448,26.202 R15.1@19.325,26.325
SCL7: R2.1 U2.2 U9.20 | length 21.1
  Top Layer w0.254: v1(9.327,19) 9.455,19 9.658,18.797 10.072,18.797 R2.1 10.185,18.84 10.632,18.84 10.8,18.672 10.984,18.488 11.052,18.42 11.801,18.42 U2.2 ; v3(14.7,6.7) 15.15,6.25 U9.20
  Bottom Layer w0.254: v1(9.327,19) 9.327,18.873 11.505,16.695 11.7,16.5 14.125,16.5 14.783,15.842 14.783,6.783 v3(14.7,6.7)
SCL8: R27.1 U10.16 U13.2 | length 11
  Top Layer w0.254: U13.2 10.759,42.746 10.198,43.306 10.148,43.306 10.025,43.429 10.025,43.529 10.148,43.652 10.198,43.652 11,44.454 11,44.87 11.77,45.641 12.264,45.641 14.698,48.075 U10.16
SCL9: R21.1 U10.7 U11.2 | length 30.5
  Top Layer w0.254: U11.2 2.235,37.44 1.928,37.747 1.623,37.747 1.5,37.87 R21.1 1.193,37.9 0.806,38.287 0.806,52.97 0.955,53.119 8.076,53.119 8.225,52.97 8.225,51.175 10.025,49.375 U10.7@11.03,49.375
SCL10: R5.1 U3.2 U10.9 | length 14.4
  Top Layer w0.254: v1(9.292,38.521) 9.335,38.521 9.531,38.325 R5.1 10.1,38.275 10.223,38.152 10.473,38.152 10.784,37.841 U3.2 ; v1(9.475,48.025) 9.525,48.075 U10.9
  Bottom Layer w0.254: v1(9.292,38.521) 9.292,38.558 8.925,38.925 8.925,45.65 9.475,46.2 v1(9.475,48.025)
SCL11: R14.1 U7.2 U10.11 | length 28.3
  Top Layer w0.254: v1(0.55,32.05) 0.603,32.05 0.728,31.925 1.5,31.925 1.623,31.802 1.798,31.802 2.175,31.425 2.569,31.425 2.576,31.433 3.251,31.433 U7.2 ; v1(1.491,46.25) 2.59,45.15 7.7,45.15 9.25,46.7 11.025,46.7 U10.11
  Bottom Layer w0.254: v1(0.55,32.05) 0.55,45.309 v1(1.491,46.25)
SCL12: R31.1 U10.14 U15.2 | length 23.7
  Top Layer w0.254: v1(8.775,33.75) 9.004,33.75 9.03,33.776 9.041,33.766 9.909,33.766 9.977,33.698 10.027,33.698 10.15,33.575 R31.1 10.15,33.475 10.273,33.352 10.373,33.352 10.742,32.983 U15.2 ; U10.14@16.77,46.775 18.576,46.775 18.725,46.626 v1(18.725,45.641)
  Bottom Layer w0.254: v1(8.775,33.75) 8.775,35.875 9.775,36.875 11.9,36.875 16.069,41.044 16.069,42.393 16.225,42.55 16.225,43.141 v1(18.725,45.641)
"SCL IN": J3.1 R20.2 U9.22 U10.22 | length 58.5
  Top Layer w0.254: U9.22 16.918,7.628 17.728,7.628 19.231,9.131 19.231,18.924 19.329,19.022 v3(19.329,19.075) ; U10.22 18.4,51.975 18.502,51.873 18.552,51.873 18.675,51.75 R20.2 19.3,51.7 J3.1 23.25,50.1 24.575,48.775 24.575,42.275 v3(23.7,41.4) ; v3(21.125,34.875) 21.178,34.875 21.278,34.775 22.575,34.775 23.363,35.563 23.363,35.888 23.6,36.125 v3(23.6,36.15)
  Bottom Layer w0.254: v3(19.329,19.075) 19.075,19.075 16.25,21.9 16.25,31.15 19.975,34.875 v3(21.125,34.875) ; v3(23.6,36.15) 23.625,36.15 23.9,36.425 23.9,41.153 23.7,41.353 v3(23.7,41.4)
SDA0: R3.1 U1.3 U9.4 | length 9.9
  Top Layer w0.254: U9.4 9.075,6.9 8.75,7.225 8.75,10.6 10.027,11.877 10.077,11.877 10.2,12 R3.1 10.264,12.114 10.682,12.114 11.088,12.521 11.937,12.521 U1.3
SDA1: R8.1 U4.3 U9.6 | length 29.4
  Top Layer w0.254: v1(7.671,6.219) 7.699,6.219 7.942,5.975 8.65,5.975 9.025,5.6 U9.6 ; v1(9.475,21.976) 9.586,21.976 9.911,22.302 10.002,22.302 10.125,22.425 10.125,22.525 10.248,22.648 10.298,22.648 10.416,22.766 U4.3
  Bottom Layer w0.254: v1(7.671,6.219) 7.671,6.152 7.794,6.029 7.794,4.099 7.942,3.95 9.476,3.95 9.625,4.099 9.625,12.266 8.575,13.316 8.575,17.726 8.613,17.763 8.613,19.95 8.582,19.981 8.582,20.192 9.531,21.141 9.531,21.922 9.586,21.976 v1(9.475,21.976)
SDA2: R11.1 U5.3 U9.8 | length 29.9
  Top Layer w0.254: U5.3 1.854,24.979 1.648,24.773 1.598,24.773 1.598,24.673 0.8,23.875 0.8,22.95 2.675,21.075 2.675,7.35 5.725,4.3 U9.8
SDA3: R30.1 U9.10 U14.3 | length 39.4
  Top Layer w0.254: v1(0.85,21.05) 0.944,21.05 1.39,20.603 1.39,6.935 3.194,5.131 5.325,3 U9.10 ; v1(9.504,27.1) 9.542,27.138 10.027,27.138 10.15,27.261 R30.1 10.265,27.39 10.615,27.39 10.849,27.624 U14.3
  Bottom Layer w0.254: v1(0.85,21.05) 1.9,21.05 5.225,24.375 6.75,24.375 9.475,27.1 v1(9.504,27.1)
SDA4: R12.1 U6.3 U9.13 | length 49
  Top Layer w0.254: U9.13 24.176,1.7 24.325,1.849 24.325,22.833 24.19,22.969 v1(24.19,23.035) ; v1(18.325,35.9) 18.325,36.329 18.508,36.512 19.188,36.512 R12.1 19.2,36.55 19.323,36.673 19.373,36.673 19.65,36.95 U6.3
  Bottom Layer w0.254: v1(18.325,35.9) 18.825,35.4 21.6,35.4 24.19,32.81 v1(24.19,23.035)
SDA5: R26.1 U9.15 U12.3 | length 40.1
  Top Layer w0.254: U9.15 22.926,3 23.075,3.149 23.075,21.8 22,22.875 v1(21.4,22.875) ; v1(18.475,30.625) 18.482,30.618 19.243,30.618 19.398,30.773 19.448,30.773 19.621,30.946 U12.3
  Bottom Layer w0.254: v1(18.475,30.625) 20.8,30.625 21,30.425 21,23.275 v1(21.4,22.875)
SDA6: R17.1 U8.3 U9.17 | length 29.4
  Top Layer w0.254: U9.17 21.4,4.3 21.925,4.825 21.925,20.751 21.776,20.9 21.275,20.9 18.65,23.525 18.65,24.901 18.799,25.05 R17.1@19.252,25.05 ; R17.1 19.415,25.215 21.044,25.215 U8.3
SDA7: R4.1 U2.3 U9.19 | length 20.1
  Top Layer w0.254: v1(9.308,17.475) 9.411,17.475 9.623,17.688 10.138,17.688 R4.1 10.15,17.725 10.273,17.848 10.323,17.848 10.382,17.907 U2.3 ; v3(13.65,6.425) 13.65,6.4 14.45,5.6 U9.19
  Bottom Layer w0.254: v1(9.308,17.475) 9.355,17.428 9.672,17.428 11.174,15.926 12.45,15.926 13.65,14.726 v3(13.65,6.425)
SDA8: R29.1 U10.15 U13.3 | length 11.9
  Top Layer w0.254: v1(9.458,42.457) 9.507,42.408 9.967,42.408 10.142,42.233 11.737,42.233 U13.3 ; v1(14.014,45.947) 14.052,45.985 14.125,45.985 15.565,47.425 U10.15
  Bottom Layer w0.254: v1(9.458,42.457) 9.458,42.533 12.872,45.947 v1(14.014,45.947)
SDA9: R25.1 U10.6 U11.3 | length 32.6
  Top Layer w0.254: U11.3 2.365,36.94 2.025,36.6 R25.1 1.2,36.6 0.4,37.4 0.4,53.287 0.638,53.525 8.393,53.525 8.631,53.287 8.631,51.369 9.6,50.4 9.975,50.025 U10.6@11.03,50.025
SDA10: R7.1 U3.3 U10.8 | length 18.5
  Top Layer w0.254: v1(8.475,49.575) 9.325,48.725 U10.8 ; v1(8.956,37.444) 9.009,37.444 9.203,37.25 9.378,37.075 R7.1 10.653,37.075 10.92,37.341 U3.3
  Bottom Layer w0.254: v1(8.475,49.575) 8.475,37.925 v1(8.956,37.444)
SDA11: R16.1 U7.3 U10.10 | length 30.9
  Top Layer w0.254: v1(0.515,30.597) 1.497,30.597 R16.1 2.077,30.625 2.388,30.937 3.255,30.937 U7.3 ; v1(2.45,48.45) 3.75,47.15 8.35,47.15 8.538,47.337 10.293,47.337 10.303,47.347 11.022,47.347 U10.10
  Bottom Layer w0.254: v1(0.515,30.597) 2.075,32.157 2.075,48.075 v1(2.45,48.45)
SDA12: R32.1 U10.13 U15.3 | length 21.6
  Top Layer w0.254: v1(9.25,32.3) 10.075,32.3 R32.1 10.125,32.36 10.248,32.483 U15.3 ; U10.13@16.8,46.085 U10.13 17.059,46.125 17.137,46.047 17.137,45.688 17.625,45.2 17.625,43.431 v1(17.634,43.422)
  Bottom Layer w0.254: v1(9.25,32.3) 9.25,33.262 9.545,33.557 9.545,35.12 10.7,36.275 12.125,36.275 16.475,40.625 16.475,42.225 17.012,42.762 17.587,42.762 17.587,43.375 v1(17.634,43.422)
"SDA IN": J3.0 R24.2 U9.23 U10.23 | length 61.7
  Top Layer w0.254: U9.23 16.918,8.278 17.712,8.278 18.825,9.391 18.825,20.222 18.6,20.447 v3(18.6,20.5) ; U10.23 16.865,52.65 17.725,52.65 17.975,52.9 R24.2 18.675,52.85 18.798,52.727 18.848,52.727 19.475,52.1 J3.0 26.022,52.1 26.171,51.951 26.171,42.096 v3(24.975,40.9) ; v3(20.625,34.075) 22.65,34.075 23.475,34.9 24.325,34.9 v3(24.45,35.025)
  Bottom Layer w0.254: v3(18.6,20.5) 18.6,20.625 16.825,22.4 16.825,31.051 19.849,34.075 v3(20.625,34.075) ; v3(24.45,35.025) 24.55,35.125 24.55,40.475 v3(24.975,40.9)
VCC: C1.1 C2.1 C5.1 C6.1 C9.1 C10.1 C13.1 C14.1 C17.1 C18.1 C21.1 C22.1 C25.1 C27.1 C28.1 R1.2 R2.2 R3.2 R4.2 R5.2 R6.2 R7.2 R8.2 R9.2 R10.2 R11.2 R12.2 R13.2 R14.2 R15.2 R16.2 R17.2 R18.1 R20.1 R21.2 R22.2 R24.1 R25.2 R26.2 R27.2 R28.2 R29.2 R30.2 R31.2 R32.2 R33.2 U1.5 U1.10 U2.5 U2.10 U3.5 U3.10 U4.5 U4.10 U5.5 U5.10 U6.5 U6.10 U7.5 U7.10 U8.5 U8.10 U9.24 U10.24 U11.5 U11.10 U12.5 U12.10 U13.5 U13.10 U14.5 U14.10 U15.5 U15.10 | length 128.3
  Top Layer w0.254: R11.2 1.475,23.55 1.598,23.427 1.648,23.427 2.15,22.925 v2(2.575,22.925) 2.575,23.365 2.817,23.607 2.817,23.966 2.83,23.979 U5.5 ; R9.2 1.598,26.898 1.598,27.07 1.625,27.097 v2(1.625,27.75) 1.625,28.638 ; R14.2 1.5,33.025 1.623,33.148 1.673,33.148 2.8,34.275 v1(2.8,34.875) ; R25.2 1.5,35.55 1.623,35.427 1.673,35.427 2.225,34.875 v1(2.8,34.875) ; R21.2 v2(1.5,40.1) ; R16.2 1.625,29.525 1.625,28.638 ; U7.5 2.905,29.946 2.892,29.933 2.892,29.574 1.956,28.638 1.625,28.638 ; U11.5 2.991,35.94 2.978,35.927 2.978,35.567 2.8,35.39 v1(2.8,34.875) ; C17.1 7.019,39.325 C17.1@7.069,39.325 ; U5.10 7.338,25.979 7.325,25.992 C9.1 7.375,27.55 7.498,27.673 7.498,27.723 8.042,28.267 8.042,28.592 v2(8.075,28.625) 8.925,29.475 ; U7.10 7.564,33.086 7.448,33.202 7.448,33.252 7.325,33.375 C13.1 7.275,34.075 6.475,34.875 v1(2.8,34.875) ; U11.10 7.363,37.94 7.35,37.953 7.35,38.994 7.148,39.196 7.148,39.246 C17.1@7.069,39.325 ; v2(7.942,39.258) 7.873,39.258 7.805,39.325 C17.1@7.069,39.325 ; v2@8.025,39.325 R5.2 ; v2(9.108,16.3) 9.376,16.3 9.578,16.502 10.027,16.502 10.15,16.625 R4.2 10.255,16.78 10.626,16.78 10.74,16.894 11.801,16.894 U2.5 ; R13.2 9.386,8.75 9.509,8.873 9.559,8.873 10.323,9.637 10.323,9.973 v2(10.35,10) 10.35,10.728 10.323,10.755 10.323,10.927 R3.2 ; R33.2 9.386,53.375 9.509,53.498 9.559,53.498 10.336,54.275 v2(10.4,54.275) ; v2@9.524,20.426 9.599,20.426 9.977,20.048 10.027,20.048 10.15,19.925 R2.2 ; v2(9.547,20.403) 9.547,20.547 10.01,21.01 10.01,21.36 R8.2 10.125,21.525 10.248,21.648 10.298,21.648 10.416,21.766 U4.5 ; v2(9.75,45.275) 9.75,44.801 9.899,44.652 9.902,44.652 10.025,44.529 R27.2 ; R29.2 10.129,41.246 U13.5 11.754,41.25 v2(13.65,41.25) ; R28.2 8.925,29.475 ; R7.2 10.125,36.025 10.248,35.902 10.298,35.902 v2@10.85,35.35 ; R6.2 10.15,24.679 10.273,24.802 10.323,24.802 10.846,25.325 10.846,25.561 10.847,25.563 10.847,25.897 v2(10.875,25.925) ; R30.2 10.15,26.225 10.273,26.102 10.323,26.102 10.492,25.933 10.867,25.933 v2(10.875,25.925) ; R31.2 10.273,34.648 10.273,34.723 v2(10.85,35.3) v2@10.85,35.35 ; R1.2 10.2,14.275 10.4,14.475 v2(10.4,14.975) ; U14.5 11.466,26.624 11.453,26.611 11.453,26.252 11.174,25.974 10.924,25.974 v2(10.875,25.925) ; U15.5 11.23,31.483 11.097,31.35 R32.2 9.575,31.35 8.925,30.7 8.925,29.475 ; U3.5 11.48,36.341 11.467,36.328 11.467,35.969 10.85,35.352 v2@10.85,35.35 ; U1.5 14.116,11.534 v2(14.25,11.4) 14.25,10.642 14.402,10.49 14.402,10.227 14.525,10.104 C27.1 14.575,9.325 15.05,8.85 U9.24 ; C28.1 14.7,54.529 14.823,54.406 14.823,54.356 15.877,53.303 17.172,53.303 17.222,53.353 17.222,53.712 17.326,53.816 17.326,54.051 v2(17.375,54.1) 17.444,54.1 17.644,53.9 R24.1 ; U13.10 16.212,43.246 16.225,43.259 C21.1 16.275,44.675 16.475,44.875 v2(17.05,44.875) ; U2.10 16.537,18.907 16.55,18.92 16.55,20.214 16.525,20.239 C2.1 16.575,20.337 16.698,20.214 16.698,20.164 17.238,19.624 17.401,19.624 v2(17.45,19.575) ; U4.10 16.262,23.766 16.275,23.779 C6.1 16.325,25.195 16.448,25.318 16.448,25.368 18.088,27.008 18.088,28.062 ; U14.10 16.312,28.624 16.325,28.637 C22.1 16.375,30.054 16.629,29.8 v2(17.4,29.8) ; U15.10 15.963,33.483 15.95,33.496 C25.1 16,34.912 16.123,35.035 16.123,35.085 16.414,35.376 16.626,35.376 v2(16.675,35.425) ; U3.10 16.15,38.352 C5.1 16.2,39.771 16.323,39.648 16.323,39.598 16.675,39.246 v2(16.675,39.2) ; U1.10 16.337,13.534 16.35,13.547 16.35,14.575 ; C1.1 16.35,14.575 ; v2(16.9,14.225) 16.851,14.274 16.651,14.274 16.35,14.575 ; R18.1 18.554,48.85 18.677,48.973 18.727,48.973 19.126,49.372 19.126,49.551 v2(19.175,49.6) 18.675,50.1 R20.1 ; R12.2 18.55,34.85 v2(18.55,34.375) 18.55,33.525 R22.2 ; R10.2 19.2,38.704 19.323,38.827 19.373,38.827 20.025,39.479 v2(20.025,39.5) ; R26.2 19.275,29.65 19.152,29.773 19.102,29.773 19.075,29.8 v2(17.4,29.8) ; R15.2 18.775,27.375 18.088,28.062 ; R17.2 19.421,24.221 U8.5 21.645,24.221 21.658,24.208 21.658,24.174 21.807,24.025 v2(23.15,24.025) ; U6.5 22.261,35.95 22.625,36.314 v2(22.625,36.325) ; U12.5 21.398,29.946 21.411,29.933 21.411,29.574 21.735,29.25 21.735,28.89 v2(21.75,28.875) 21.775,28.9 24.225,28.9 25.277,27.848 25.277,27.798 25.4,27.675 C14.1 25.45,26.234 25.437,26.221 U8.10 ; v2(24.125,0.9) 25.023,1.798 25.748,1.798 v4(25.825,1.875) ; U6.10 25.237,37.95 25.25,37.963 C10.1 25.345,39.475 v2(26.525,39.475) ; U12.10 25.188,31.946 25.175,31.959 C18.1 25.25,33.425 v2(26.575,33.425) ; v2(17.4,29.8) 17.4,28.75 18.088,28.062
pads on no net: U1.6 U2.6 U3.6 U4.6 U5.6 U6.6 U7.6 U8.6 U10.4 U10.5 U10.17 U10.18 U10.19 U10.20 U11.6 U12.6 U13.6 U14.6 U15.6

## Polygon pours and split planes (outlines as drawn)
GND on Int1 (GND) (split plane): 27.43,0.51 0.51,0.51 0.51,54.49 27.43,54.49
VCC on Int2 (PWR) (split plane): 27.43,0.51 0.51,0.51 0.51,54.49 27.43,54.49

## Silkscreen, mask and mechanical layers (free items; w line width, h text height)
Top Overlay:
  text "GND" at 3.875,2.525 h1
  text "VCC" at 22.525,2 h1
Bottom Overlay:
  text "SDA IN" at 25.05,51.9 h1
  text "MOTOR 0" at 5.9,50.775 h1
  text "SCL IN" at 25,49.75 h1
  text "MOTOR 1" at 5.925,46.7 h1
  text "MOTOR 7" at 25.925,46.675 h1
  text "MOTOR 8" at 25.85,42.875 h1
  text "MOTOR 2" at 5.75,42.425 h1
  text "MOTOR 9" at 25.8,18.575 h1
  text "MOTOR 3" at 5.75,18.2 h1
  text "MOTOR 10" at 26.425,14.45 h1
  text "MOTOR 4" at 5.825,14.2 h1
  text "MOTOR 11" at 26.55,10.4 h1
  text "MOTOR 5" at 5.85,10.275 h1
  text "MOTOR 12" at 26.25,6.175 h1
  text "MOTOR 6" at 5.8,6.05 h1
  text "ADAM BAUMANN / THESIS PROJECT VTF DRIVER / V3" at 20.625,1.625 h1
Mechanical 1:
  lines w0.254: 0,48.26 0,50.927 ; 0,0 0,55 27.94,55 27.94,0 0,0